# EAGLE board CT_schematic (EAGLE 7.6.0)

Size 100 x 80 mm. Coordinates in mm from the lower left corner, seen from the top.
Outline: 0,0 100,0 100,80 0,80 0,0
Copper layers (1*16): Top 0.035mm / dielectric 1.5mm / Bottom 0.035mm
Design rules "default": minimum track width 10mil, minimum drill 24mil, track to track 8mil, track to pad 8mil, pad to pad 8mil, via to via 8mil, smd to smd 8mil, copper to edge 40mil, drill to drill 8mil, minimum pad ring 10mil, minimum via ring 8mil, stop-mask expansion 4mil, vias tented up to drill 0mil, thermal gap 10mil

## Footprints (pad centres in the part's own frame; a part is rotated, then mirrored left to right if it is on the bottom)
C0603 = smd 0.8 x 0.8: 1 -0.762,0; 2 0.762,0
C0402 = smd 0.5 x 0.5: 1 -0.508,0; 2 0.508,0
C0805 = smd 1.2 x 1.3: 1 -1.016,0; 2 1.016,0
C1206 = smd 1.3 x 1.6: 1 -1.524,0; 2 1.524,0
L0603 = smd 0.8 x 0.8: 1 -0.762,0; 2 0.762,0
DR1040 = smd 1.6 x 3.2: 1 -4.458,0; 2 4.458,0
R0603 = smd 0.8 x 0.8: 1 -0.762,0; 2 0.762,0
LQFP100 = smd 0.3 x 1.2: 1 -6,-7.75; 2 -5.5,-7.75; 3 -5,-7.75; 4 -4.5,-7.75; 5 -4,-7.75; 6 -3.5,-7.75; 7 -3,-7.75; 8 -2.5,-7.75; 9 -2,-7.75; 10 -1.5,-7.75; 11 -1,-7.75; 12 -0.5,-7.75; 13 0,-7.75; 14 0.5,-7.75; 15 1,-7.75; 16 1.5,-7.75; 17 2,-7.75; 18 2.5,-7.75; 19 3,-7.75; 20 3.5,-7.75; 21 4,-7.75; 22 4.5,-7.75; 23 5,-7.75; 24 5.5,-7.75; 25 6,-7.75; 51 6,7.75; 52 5.5,7.75; 53 5,7.75; 54 4.5,7.75; 55 4,7.75; 56 3.5,7.75; 57 3,7.75; 58 2.5,7.75; 59 2,7.75; 60 1.5,7.75; 61 1,7.75; 62 0.5,7.75; 63 0,7.75; 64 -0.5,7.75; 65 -1,7.75; 66 -1.5,7.75; 67 -2,7.75; 68 -2.5,7.75; 69 -3,7.75; 70 -3.5,7.75; 71 -4,7.75; 72 -4.5,7.75; 73 -5,7.75; 74 -5.5,7.75; 75 -6,7.75 | smd 1.2 x 0.3: 26 7.75,-6; 27 7.75,-5.5; 28 7.75,-5; 29 7.75,-4.5; 30 7.75,-4; 31 7.75,-3.5; 32 7.75,-3; 33 7.75,-2.5; 34 7.75,-2; 35 7.75,-1.5; 36 7.75,-1; 37 7.75,-0.5; 38 7.75,0; 39 7.75,0.5; 40 7.75,1; 41 7.75,1.5; 42 7.75,2; 43 7.75,2.5; 44 7.75,3; 45 7.75,3.5; 46 7.75,4; 47 7.75,4.5; 48 7.75,5; 49 7.75,5.5; 50 7.75,6; 76 -7.75,6; 77 -7.75,5.5; 78 -7.75,5; 79 -7.75,4.5; 80 -7.75,4; 81 -7.75,3.5; 82 -7.75,3; 83 -7.75,2.5; 84 -7.75,2; 85 -7.75,1.5; 86 -7.75,1; 87 -7.75,0.5; 88 -7.75,0; 89 -7.75,-0.5; 90 -7.75,-1; 91 -7.75,-1.5; 92 -7.75,-2; 93 -7.75,-2.5; 94 -7.75,-3; 95 -7.75,-3.5; 96 -7.75,-4; 97 -7.75,-4.5; 98 -7.75,-5; 99 -7.75,-5.5; 100 -7.75,-6
TST-110-05-T-D-RA = drill 1 pad 1.7 square: 1 0,0 | drill 1 pad 1.7: 2 0,2.54; 3 2.54,0; 4 2.54,2.54; 5 5.08,0; 6 5.08,2.54; 7 7.62,0; 8 7.62,2.54; 9 10.16,0; 10 10.16,2.54; 11 12.7,0; 12 12.7,2.54; 13 15.24,0; 14 15.24,2.54; 15 17.78,0; 16 17.78,2.54; 17 20.32,0; 18 20.32,2.54; 19 22.86,0; 20 22.86,2.54
VFBGA-63 = smd 0.4 x 0.4: A1 -3.6,4.4; A2 -2.8,4.4; A9 2.8,4.4; A10 3.6,4.4; B1 -3.6,3.6; B9 2.8,3.6; B10 3.6,3.6; C3 -2,2.8; C4 -1.2,2.8; C5 -0.4,2.8; C6 0.4,2.8; C7 1.2,2.8; C8 2,2.8; D3 -2,2; D4 -1.2,2; D5 -0.4,2; D6 0.4,2; D7 1.2,2; D8 2,2; E3 -2,1.2; E4 -1.2,1.2; E5 -0.4,1.2; E6 0.4,1.2; E7 1.2,1.2; E8 2,1.2; F3 -2,0.4; F4 -1.2,0.4; F5 -0.4,0.4; F6 0.4,0.4; F7 1.2,0.4; F8 2,0.4; G3 -2,-0.4; G4 -1.2,-0.4; G5 -0.4,-0.4; G6 0.4,-0.4; G7 1.2,-0.4; G8 2,-0.4; H3 -2,-1.2; H4 -1.2,-1.2; H5 -0.4,-1.2; H6 0.4,-1.2; H7 1.2,-1.2; H8 2,-1.2; J3 -2,-2; J4 -1.2,-2; J5 -0.4,-2; J6 0.4,-2; J7 1.2,-2; J8 2,-2; K3 -2,-2.8; K4 -1.2,-2.8; K5 -0.4,-2.8; K6 0.4,-2.8; K7 1.2,-2.8; K8 2,-2.8; L1 -3.6,-3.6; L2 -2.8,-3.6; L9 2.8,-3.6; L10 3.6,-3.6; M1 -3.6,-4.4; M2 -2.8,-4.4; M9 2.8,-4.4; M10 3.6,-4.4
QFN65P400X400X100-17N = smd 1.016 x 0.356: 1 -1.803,0.965; 2 -1.803,0.33; 3 -1.803,-0.33; 4 -1.803,-0.965; 9 1.803,-0.965; 10 1.803,-0.33; 11 1.803,0.33; 12 1.803,0.965 | smd 0.356 x 1.016: 5 -0.965,-1.803; 6 -0.33,-1.803; 7 0.33,-1.803; 8 0.965,-1.803; 13 0.965,1.803; 14 0.33,1.803; 15 -0.33,1.803; 16 -0.965,1.803 | smd 2.108 x 2.108: 17 0,0
HTSS-105-01-G-D = drill 1 pad 1.8 square: 1 0,0 | drill 1 pad 1.8: 2 0,2.54; 3 2.54,0; 4 2.54,2.54; 5 5.08,0; 6 5.08,2.54; 7 7.62,0; 8 7.62,2.54; 9 10.16,0; 10 10.16,2.54
FCI_10118193-0001LF = smd 0.4 x 1.35: 1 -1.3,2.675; 2 -0.65,2.675; 3 0,2.675; 4 0.65,2.675; 5 1.3,2.675 | smd 1.6 x 1.4: 6 -3.2,2.45; 7 3.2,2.45 | smd 1.9 x 1.9: 8 -1.2,0; 9 1.2,0 | hole 0.5: -3.3,0; 3.3,0
SOT143B = smd 1 x 0.7: 1 -0.75,-1 | smd 0.6 x 0.7: 2 0.95,-1; 3 0.95,1; 4 -0.95,1
ABS07-32.768KHZ-7-T = smd 1.1 x 2.4: 1 -2.5,0; 2 0,0
ASFL1 = smd 1.7 x 1.5: 1 -1.27,-1.1; 2 1.27,-1.1; 3 1.27,1.1; 4 -1.27,1.1
TSOT-23-5 = smd 1.3 x 0.62: 1 -1.31,0.95; 2 -1.31,0; 3 -1.31,-0.95; 4 1.31,-0.95; 5 1.31,0.95
DFN8_2X3MC = smd 0.813 x 0.305: 1 -1.398,0.75; 2 -1.398,0.25; 3 -1.398,-0.25; 4 -1.398,-0.75; 5 1.398,-0.75; 6 1.398,-0.25; 7 1.398,0.25; 8 1.398,0.75 | smd 1.753 x 1.549: 9 0,0
JST-2-SMD = smd 1 x 4.6: 1 -1,-3.7; 2 1,-3.7 | smd 1.6 x 3.4: NC1 -3.4,1.5; NC2 3.4,1.5
SON-6 = smd 0.55 x 0.3: 1 -0.355,0.5 | smd 0.52 x 0.3: 2 -0.37,0; 3 -0.37,-0.5; 4 0.37,-0.5; 5 0.37,0; 6 0.37,0.5
SW_4-1437565-2 = smd 1.4 x 2.1: 1 -2.23,4.55; 2 -2.23,-4.55; 3 2.23,4.55; 4 2.23,-4.55
LGM67K-G1J2-24-Z = smd 0.8 x 1.4: A -2,0; C 0,0
NC7SZ125M5X = smd 1.3 x 0.7: 1 -1.3,0.95; 2 -1.3,0; 3 -1.3,-0.95; 4 1.3,-0.95; 5 1.3,0.95
DUMMY_PACKAGE_174 = drill 0.3: 1 0,-1; 2 1.5,-1; 3 3,-1

## Placement (x,y rotation side)
C1  1e-06  [C0603]  -15.24,68.58 0 top  (outside the outline)
C2  1e-07  [C0603]  -19.05,68.58 0 top  (outside the outline)
C3  1e-07  [C0603]  -22.86,68.58 0 top  (outside the outline)
C4  1e-07  [C0603]  -26.67,68.58 0 top  (outside the outline)
C5  1e-07  [C0603]  -30.48,68.58 0 top  (outside the outline)
C6  1e-07  [C0603]  -34.29,68.58 0 top  (outside the outline)
C7  1e-07  [C0603]  -38.1,68.58 0 top  (outside the outline)
C8  4.7e-06  [C0603]  -59.69,63.5 0 top  (outside the outline)
C9  2.2e-09  [C0603]  -63.5,63.5 0 top  (outside the outline)
C10  2.2e-09  [C0603]  -67.31,63.5 0 top  (outside the outline)
C11  1e-08  [C0603]  -41.91,68.58 0 top  (outside the outline)
C12  1e-06  [C0603]  -45.72,68.58 0 top  (outside the outline)
C13  1e-11  [C0402]  -22.86,73.66 0 top  (outside the outline)
C14  1e-11  [C0402]  -26.67,73.66 0 top  (outside the outline)
C15  1e-06  [C0603]  -49.53,68.58 0 top  (outside the outline)
C16  1e-07  [C0402]  -30.48,73.66 0 top  (outside the outline)
C17  1e-07  [C0402]  -34.29,73.66 0 top  (outside the outline)
C18  1e-07  [C0402]  -38.1,73.66 0 top  (outside the outline)
C19  1e-07  [C0402]  -41.91,73.66 0 top  (outside the outline)
C20  1e-07  [C0402]  -45.72,73.66 0 top  (outside the outline)
C21  1e-07  [C0402]  -49.53,73.66 0 top  (outside the outline)
C22  2.2e-06  [C0603]  -71.12,63.5 0 top  (outside the outline)
C23  1e-07  [C0402]  -53.34,73.66 0 top  (outside the outline)
C24  1e-07  [C0402]  -57.15,73.66 0 top  (outside the outline)
C25  1e-06  [C0603]  -53.34,68.58 0 top  (outside the outline)
C26  1e-08  [C0402]  -60.96,73.66 0 top  (outside the outline)
C27  1e-05  [C0805]  -53.34,50.8 0 top  (outside the outline)
C28  1e-05  [C0805]  -58.42,50.8 0 top  (outside the outline)
C29  1e-07  [C0402]  -64.77,73.66 0 top  (outside the outline)
C30  1e-05  [C1206]  -29.21,50.8 0 top  (outside the outline)
C31  1e-05  [C1206]  -35.56,50.8 0 top  (outside the outline)
C32  1e-08  [C0402]  -68.58,73.66 0 top  (outside the outline)
C33  1e-08  [C0402]  -72.39,73.66 0 top  (outside the outline)
F1  240.0  [L0603]  -57.15,68.58 0 top  (outside the outline)
I1  2.5e-06  [DR1040]  -38.1,22.86 0 top  (outside the outline)
R2  1000.0  [R0603]  -60.96,68.58 0 top  (outside the outline)
R4  4700.0  [R0603]  -64.77,68.58 0 top  (outside the outline)
R6  2200.0  [R0603]  -68.58,68.58 0 top  (outside the outline)
R7  10000.0  [R0603]  -30.48,58.42 0 top  (outside the outline)
R8  10000.0  [R0603]  -35.56,58.42 0 top  (outside the outline)
R9  10000.0  [R0603]  -40.64,58.42 0 top  (outside the outline)
R10  10000.0  [R0603]  -45.72,58.42 0 top  (outside the outline)
R11  10000.0  [R0603]  -50.8,58.42 0 top  (outside the outline)
R12  10000.0  [R0603]  -55.88,58.42 0 top  (outside the outline)
R13  10000.0  [R0603]  -60.96,58.42 0 top  (outside the outline)
R14  10000.0  [R0603]  -66.04,58.42 0 top  (outside the outline)
R15  10000.0  [R0603]  -71.12,58.42 0 top  (outside the outline)
R16  10000.0  [R0603]  -15.24,63.5 0 top  (outside the outline)
R17  10000.0  [R0603]  -20.32,63.5 0 top  (outside the outline)
R18  10000.0  [R0603]  -25.4,63.5 0 top  (outside the outline)
R19  10000.0  [R0603]  -30.48,63.5 0 top  (outside the outline)
R20  10000.0  [R0603]  -35.56,63.5 0 top  (outside the outline)
R21  10000.0  [R0603]  -40.64,63.5 0 top  (outside the outline)
R22  47.0  [R0603]  -72.39,68.58 0 top  (outside the outline)
R23  220000.0  [R0603]  -15.24,58.42 0 top  (outside the outline)
R24  1000000.0  [R0603]  -71.12,50.8 0 top  (outside the outline)
R25  10000.0  [R0603]  -45.72,63.5 0 top  (outside the outline)
R26  10000.0  [R0603]  -50.8,63.5 0 top  (outside the outline)
R27  9100.0  [R0603]  -15.24,73.66 0 top  (outside the outline)
R28  680000.0  [R0603]  -20.32,58.42 0 top  (outside the outline)
R29  120000.0  [R0603]  -25.4,58.42 0 top  (outside the outline)
R30  2000.0  [R0603]  -19.05,73.66 0 top  (outside the outline)
R31  10000.0  [R0603]  -55.88,63.5 0 top  (outside the outline)
U1  STM32F429VIT6  [LQFP100]  -24.13,8.89 0 top  (outside the outline)
U2  TST-110-05-T-D-RA  [TST-110-05-T-D-RA]  -46.99,41.91 0 top  (outside the outline)
U3  mt29f4g08abadah4  [VFBGA-63]  -63.5,6.35 0 top  (outside the outline)
U4  TSC2013QRSARQ1  [QFN65P400X400X100-17N]  -54.61,7.62 0 top  (outside the outline)
U5  HTSS-105-01-G-D  [HTSS-105-01-G-D]  -27.94,34.29 0 top  (outside the outline)
U6  10118193-0001LF  [FCI_10118193-0001LF]  -53.34,34.29 0 top  (outside the outline)
U7  prtr5v0u2ax  [SOT143B]  -24.13,78.74 0 top  (outside the outline)
U8  ABS07-32.768KHZ-7-T  [ABS07-32.768KHZ-7-T]  -64.77,44.45 0 top  (outside the outline)
U9  ASFL1-25MHZ-NCS  [ASFL1]  -44.45,34.29 0 top  (outside the outline)
U10  ltc3406es5  [TSOT-23-5]  -63.5,50.8 0 top  (outside the outline)
U11  MCP73831T-2ACI/MC  [DFN8_2X3MC]  -39.37,77.47 0 top  (outside the outline)
U12  S2B-PH-SM4-TB(LF)(SN)  [JST-2-SMD]  -53.34,24.13 0 top  (outside the outline)
U13  TPS3895ADRYR  [SON-6]  -33.02,77.47 0 top  (outside the outline)
U14  4-1437565-2  [SW_4-1437565-2]  -27.94,24.13 0 top  (outside the outline)
U15  Q65110A2395  [LGM67K-G1J2-24-Z]  -17.78,52.07 0 top  (outside the outline)
U16  nc7sz125m5x  [NC7SZ125M5X]  -40.64,50.8 0 top  (outside the outline)
U17  nc7sz125m5x  [NC7SZ125M5X]  -46.99,50.8 0 top  (outside the outline)
U18  Dummy  [DUMMY_PACKAGE_174]  -30.48,78.74 0 top  (outside the outline)

## Library data of the parts
C1-C33 F1 I1 R2 R4 R6-R31 U1-U18 = circuit_tree

## Nets
CLK_CRYSTAL_U1_8: C13.1 U1.8 U8.1
CLK_CRYSTAL_U1_9: C14.1 U1.9 U8.2
CLK_U1_12: U1.12 U9.3
GND: C1.2 C2.2 C3.2 C4.2 C5.2 C6.2 C7.2 C8.2 C9.2 C10.2 C11.2 C12.2 C13.2 C14.2 C15.2 C16.2 C17.2 C18.2 C19.2 C20.2 C21.2 C22.2 C26.2 C27.2 C28.1 C28.2 C29.2 C30.2 C31.2 C32.2 C33.2 R2.2 R8.2 R14.2 R23.2 R27.2 R29.2 R30.2 U1.10 U1.20 U1.27 U1.70 U1.74 U1.99 U2.4 U2.6 U2.8 U2.10 U2.12 U2.14 U2.16 U2.18 U2.20 U3.C5 U3.F7 U3.K3 U3.K8 U4.17 U5.9 U6.5 U6.6 U6.7 U6.8 U6.9 U7.1 U9.2 U10.2 U11.6 U11.9 U12.2 U13.2 U15.C U16.2 U16.3 U17.1 U17.3 U18.1
INPUT_USBPOWER_5V: C15.1 C30.1 R31.2 U1.68 U6.1 U7.4 U11.1 U11.2
NET_U1_14: R4.1 U1.14 U17.4
NET_U1_22: C11.1 C12.1 F1.1 U1.21 U1.22
NET_U1_37: R8.1 U1.37
NET_U1_49: C9.1 U1.49
NET_U1_73: C10.1 U1.73
NET_U1_93: R6.1 U1.93 U4.1
NET_U1_94: R7.1 U1.94
NET_U1_97: U15.A
NET_U1_98: U14.3 U14.4
NET_U2_19: R14.1 U2.19
NET_U3_C3: R19.1 U3.C3
NET_U3_C8: R15.1 U3.C8
NET_U4_4: R21.1 U4.4
NET_U4_5: R20.1 U4.5
NET_U4_9: C23.2 C24.2 C25.2 R22.2 U4.9
NET_U4_15: R22.1 U4.8 U4.15
NET_U5_3: U4.12 U5.3
NET_U5_4: U4.14 U5.4
NET_U5_5: U4.11 U5.5
NET_U5_6: U4.13 U5.6
NET_U10_1: U10.1
NET_U10_3: I1.1 U10.3
NET_U10_5: R23.1 R24.1 U10.5
NET_U10_ATNET_3: I1.2 R24.2
NET_U11_5: R31.1 U11.5
NET_U11_8: R30.1 U11.8
NET_U13_1: R26.1 R27.1 U13.1
NET_U13_3: R28.2 R29.1 U13.3
NET_U13_4: R25.1 U13.4 U16.4 U17.2
NET_U14_1: R2.1 U14.1 U14.2
PROC_FMC_D0: U1.61 U3.H4
PROC_FMC_D1: U1.62 U3.J4
PROC_FMC_D2: U1.81 U3.K4
PROC_FMC_D3: U1.82 U3.K5
PROC_FMC_D4: U1.38 U3.K6
PROC_FMC_D5: U1.39 U3.J7
PROC_FMC_D6: U1.40 U3.K7
PROC_FMC_D7: U1.41 U3.J8
PROC_FMC_NCE2: R16.1 U1.88 U3.C6
PROC_FMC_NOE: R18.1 U1.85 U3.D4
PROC_FMC_NWE: R17.1 U1.86 U3.C7
PROC_SYS_JTCK_SWCLK: R12.1 U1.76 U2.9
PROC_SYS_JTDI: R10.1 U1.77 U2.5
PROC_SYS_JTDO_SWO: U1.89 U2.13
PROC_SYS_JTMS_SWDIO: R11.1 U1.72 U2.7
PROC_SYS_JTRST: R9.1 U1.90 U2.3
PROC_TIM1_CH2: U1.42 U18.2
PROC_TIM1_CH4: U1.45 U18.3
PROC_USB_OTG_FS_DM: U1.70 U6.2 U7.3
PROC_USB_OTG_FS_DP: U1.71 U6.3 U7.2
RST_OUT_U2_SRESET_B: R13.1 U2.15 U16.1
VCC_S1_3V7: C27.1 C31.1 U10.4 U11.3 U11.4 U12.1
VCC_TIER1_3V3: C1.1 C2.1 C3.1 C4.1 C5.1 C6.1 C7.1 C8.1 C16.1 C17.1 C18.1 C19.1 C20.1 C21.1 C22.1 C23.1 C24.1 C25.1 C26.1 C28.2 C29.1 C32.1 C33.1 F1.2 I1.2 R4.2 R6.2 R7.2 R9.2 R10.2 R11.2 R12.2 R13.2 R15.2 R16.2 R17.2 R18.2 R19.2 R20.2 R21.2 R24.2 R25.2 R26.2 R28.1 U1.6 U1.11 U1.19 U1.28 U1.50 U1.75 U1.100 U2.1 U2.2 U3.D3 U3.G4 U3.H8 U3.J6 U4.7 U4.10 U9.4 U13.6 U16.5 U17.5

## Tracks (layer width: path | path; a pad name or v marks a point on that pad's centre or on a via)
CLK_CRYSTAL_U1_8  (2 unrouted)
CLK_CRYSTAL_U1_9  (2 unrouted)
CLK_U1_12  (1 unrouted)
GND  (76 unrouted)
INPUT_USBPOWER_5V  (7 unrouted)
NET_U1_14  (2 unrouted)
NET_U1_22  (4 unrouted)
NET_U1_37  (1 unrouted)
NET_U1_49  (1 unrouted)
NET_U1_73  (1 unrouted)
NET_U1_93  (2 unrouted)
NET_U1_94  (1 unrouted)
NET_U1_98  (1 unrouted)
NET_U2_19  (1 unrouted)
NET_U3_C3  (1 unrouted)
NET_U3_C8  (1 unrouted)
NET_U4_4  (1 unrouted)
NET_U4_5  (1 unrouted)
NET_U4_9  (4 unrouted)
NET_U4_15  (2 unrouted)
NET_U5_3  (1 unrouted)
NET_U5_4  (1 unrouted)
NET_U5_5  (1 unrouted)
NET_U5_6  (1 unrouted)
NET_U10_3  (1 unrouted)
NET_U10_5  (2 unrouted)
NET_U10_ATNET_3  (1 unrouted)
NET_U11_5  (1 unrouted)
NET_U11_8  (1 unrouted)
NET_U13_1  (2 unrouted)
NET_U13_3  (2 unrouted)
NET_U13_4  (3 unrouted)
NET_U14_1  (2 unrouted)
PROC_FMC_D0  (1 unrouted)
PROC_FMC_D1  (1 unrouted)
PROC_FMC_D2  (1 unrouted)
PROC_FMC_D3  (1 unrouted)
PROC_FMC_D4  (1 unrouted)
PROC_FMC_D5  (1 unrouted)
PROC_FMC_D6  (1 unrouted)
PROC_FMC_D7  (1 unrouted)
PROC_FMC_NCE2  (2 unrouted)
PROC_FMC_NOE  (2 unrouted)
PROC_FMC_NWE  (2 unrouted)
PROC_SYS_JTCK_SWCLK  (2 unrouted)
PROC_SYS_JTDI  (2 unrouted)
PROC_SYS_JTDO_SWO  (1 unrouted)
PROC_SYS_JTMS_SWDIO  (2 unrouted)
PROC_SYS_JTRST  (2 unrouted)
PROC_TIM1_CH2  (1 unrouted)
PROC_TIM1_CH4  (1 unrouted)
PROC_USB_OTG_FS_DM  (2 unrouted)
PROC_USB_OTG_FS_DP  (2 unrouted)
RST_OUT_U2_SRESET_B  (2 unrouted)
VCC_S1_3V7  (5 unrouted)
VCC_TIER1_3V3  (62 unrouted)